# EAGLE board CT_schematic (EAGLE 7.6.0)

Size 100 x 80 mm. Coordinates in mm from the lower left corner, seen from the top.
Outline: 0,0 100,0 100,80 0,80 0,0
Copper layers (1*16): Top 0.035mm / dielectric 1.5mm / Bottom 0.035mm
Design rules "default": minimum track width 10mil, minimum drill 24mil, track to track 8mil, track to pad 8mil, pad to pad 8mil, via to via 8mil, smd to smd 8mil, copper to edge 40mil, drill to drill 8mil, minimum pad ring 10mil, minimum via ring 8mil, stop-mask expansion 4mil, vias tented up to drill 0mil, thermal gap 10mil

## Footprints (pad centres in the part's own frame; a part is rotated, then mirrored left to right if it is on the bottom)
C0603 = smd 0.8 x 0.8: 1 -0.762,0; 2 0.762,0
C0402 = smd 0.5 x 0.5: 1 -0.508,0; 2 0.508,0
C0805 = smd 1.2 x 1.3: 1 -1.016,0; 2 1.016,0
2220 = smd 1.85 x 5.5: 1 -2.55,0; 2 2.55,0
EXV-9H = smd 3.505 x 1.676: 1 -2.857,0; 2 2.857,0
L0603 = smd 0.8 x 0.8: 1 -0.762,0; 2 0.762,0
WE-HCI_7030/7040/7050 = smd 2.5 x 3: 1 -2.45,0; 2 2.45,0
PJ-037B_PACKAGE = drill 3.7 square: 1 12,0 | drill 3.2 square: 2 6,0
R0603 = smd 0.8 x 0.8: 1 -0.762,0; 2 0.762,0
UFQFPN48 = smd 0.559 x 0.305: 1 -3.375,2.751; 2 -3.375,2.251; 3 -3.375,1.75; 4 -3.375,1.25; 5 -3.375,0.75; 6 -3.375,0.25; 7 -3.375,-0.25; 8 -3.375,-0.75; 9 -3.375,-1.25; 10 -3.375,-1.75; 11 -3.375,-2.251; 12 -3.375,-2.751; 25 3.375,-2.751; 26 3.375,-2.251; 27 3.375,-1.75; 28 3.375,-1.25; 29 3.375,-0.75; 30 3.375,-0.25; 31 3.375,0.25; 32 3.375,0.75; 33 3.375,1.25; 34 3.375,1.75; 35 3.375,2.251; 36 3.375,2.751 | smd 0.305 x 0.559: 13 -2.751,-3.375; 14 -2.251,-3.375; 15 -1.75,-3.375; 16 -1.25,-3.375; 17 -0.75,-3.375; 18 -0.25,-3.375; 19 0.25,-3.375; 20 0.75,-3.375; 21 1.25,-3.375; 22 1.75,-3.375; 23 2.251,-3.375; 24 2.751,-3.375; 37 2.751,3.375; 38 2.251,3.375; 39 1.75,3.375; 40 1.25,3.375; 41 0.75,3.375; 42 0.25,3.375; 43 -0.25,3.375; 44 -0.75,3.375; 45 -1.25,3.375; 46 -1.75,3.375; 47 -2.251,3.375; 48 -2.751,3.375 | smd 5.588 x 5.588: 49 0,0
SOIC-8 = smd 1.6 x 0.6: 1 -2.7,1.905 | smd 1.55 x 0.6: 2 -2.7,0.635; 3 -2.7,-0.635; 4 -2.7,-1.905; 5 2.7,-1.905; 6 2.7,-0.635; 7 2.7,0.635; 8 2.7,1.905
SSOP-28 = smd 1.5 x 0.4: 1 -3.625,4.225; 2 -3.625,3.575; 3 -3.625,2.925; 4 -3.625,2.275; 5 -3.625,1.625; 6 -3.625,0.975; 7 -3.625,0.325; 8 -3.625,-0.325; 9 -3.625,-0.975; 10 -3.625,-1.625; 11 -3.625,-2.275; 12 -3.625,-2.925; 13 -3.625,-3.575; 14 -3.625,-4.225; 15 3.625,-4.225; 16 3.625,-3.575; 17 3.625,-2.925; 18 3.625,-2.275; 19 3.625,-1.625; 20 3.625,-0.975; 21 3.625,-0.325; 22 3.625,0.325; 23 3.625,0.975; 24 3.625,1.625; 25 3.625,2.275; 26 3.625,2.925; 27 3.625,3.575; 28 3.625,4.225
FCI_10118193-0001LF = smd 0.4 x 1.35: 1 -1.3,2.675; 2 -0.65,2.675; 3 0,2.675; 4 0.65,2.675; 5 1.3,2.675 | smd 1.6 x 1.4: 6 -3.2,2.45; 7 3.2,2.45 | smd 1.9 x 1.9: 8 -1.2,0; 9 1.2,0 | hole 0.5: -3.3,0; 3.3,0
SAMTEC_FTSH-105-01-L-DV-K = smd 0.762 x 2.794: 1 -2.54,-2.032; 2 -2.54,2.032; 3 -1.27,-2.032; 4 -1.27,2.032; 5 0,-2.032; 6 0,2.032; 7 1.27,-2.032; 8 1.27,2.032; 9 2.54,-2.032; 10 2.54,2.032
TDFN-8/6MM = smd 0.3 x 0.75: 1 0,0; 2 0.5,0; 3 1,0; 4 1.5,0; 5 1.5,3; 6 1,3; 7 0.5,3; 8 0,3
ASEK = smd 1.4 x 1: 1 -1.1,-0.8; 2 1.1,-0.8; 3 1.1,0.8; 4 -1.1,0.8
ASFL1 = smd 1.7 x 1.5: 1 -1.27,-1.1; 2 1.27,-1.1; 3 1.27,1.1; 4 -1.27,1.1
IDT74FCT38072 = smd 0.51 x 1: 1 0,0; 2 1.27,0; 3 2.54,0; 4 3.81,0; 5 3.81,4.95; 6 2.54,4.95; 7 1.27,4.95; 8 0,4.95
QFN-16_EP = smd 0.805 x 0.3: 1 -1.452,0.75; 2 -1.452,0.25; 3 -1.452,-0.25; 4 -1.452,-0.75; 9 1.452,-0.75; 10 1.452,-0.25; 11 1.452,0.25; 12 1.452,0.75 | smd 0.3 x 0.805: 5 -0.75,-1.452; 6 -0.25,-1.452; 7 0.25,-1.452; 8 0.75,-1.452; 13 0.75,1.452; 14 0.25,1.452; 15 -0.25,1.452; 16 -0.75,1.452 | smd 1.55 x 1.55: 17 0,0
SON-6 = smd 0.55 x 0.3: 1 -0.355,0.5 | smd 0.52 x 0.3: 2 -0.37,0; 3 -0.37,-0.5; 4 0.37,-0.5; 5 0.37,0; 6 0.37,0.5
SW_4-1437565-2 = smd 1.4 x 2.1: 1 -2.23,4.55; 2 -2.23,-4.55; 3 2.23,4.55; 4 2.23,-4.55
LGM67K-G1J2-24-Z = smd 0.8 x 1.4: A -2,0; C 0,0
NC7SZ125M5X = smd 1.3 x 0.7: 1 -1.3,0.95; 2 -1.3,0; 3 -1.3,-0.95; 4 1.3,-0.95; 5 1.3,0.95

## Placement (x,y rotation side)
C1  1e-06  [C0603]  -15.24,69.85 0 top  (outside the outline)
C2  1e-07  [C0603]  -19.05,69.85 0 top  (outside the outline)
C3  1e-07  [C0603]  -22.86,69.85 0 top  (outside the outline)
C4  1e-07  [C0603]  -26.67,69.85 0 top  (outside the outline)
C5  1e-07  [C0603]  -30.48,69.85 0 top  (outside the outline)
C6  4.7e-06  [C0603]  -74.93,64.77 0 top  (outside the outline)
C7  1e-08  [C0603]  -34.29,69.85 0 top  (outside the outline)
C8  1e-08  [C0603]  -38.1,69.85 0 top  (outside the outline)
C9  1e-06  [C0603]  -41.91,69.85 0 top  (outside the outline)
C10  1e-08  [C0402]  -34.29,74.93 0 top  (outside the outline)
C11  1e-07  [C0402]  -38.1,74.93 0 top  (outside the outline)
C12  4.7e-06  [C0805]  -21.59,58.42 0 top  (outside the outline)
C13  1e-07  [C0402]  -41.91,74.93 0 top  (outside the outline)
C14  1e-07  [C0402]  -45.72,74.93 0 top  (outside the outline)
C15  1e-07  [C0402]  -49.53,74.93 0 top  (outside the outline)
C16  4.7e-06  [C0805]  -26.67,58.42 0 top  (outside the outline)
C17  1e-07  [C0402]  -53.34,74.93 0 top  (outside the outline)
C18  1e-07  [C0402]  -57.15,74.93 0 top  (outside the outline)
C19  1e-07  [C0402]  -60.96,74.93 0 top  (outside the outline)
C20  1e-08  [C0402]  -64.77,74.93 0 top  (outside the outline)
C21  1e-08  [C0402]  -68.58,74.93 0 top  (outside the outline)
C22  1e-08  [C0402]  -72.39,74.93 0 top  (outside the outline)
C23  1e-08  [C0402]  -76.2,74.93 0 top  (outside the outline)
C24  1e-08  [C0402]  -15.24,80.01 0 top  (outside the outline)
C25  1e-05  [C0805]  -31.75,58.42 0 top  (outside the outline)
C26  1e-06  [C0603]  -45.72,69.85 0 top  (outside the outline)
C27  1e-07  [C0402]  -19.05,80.01 0 top  (outside the outline)
C28  6.8e-05  [2220]  -31.75,34.29 0 top  (outside the outline)
C29  1e-07  [C0402]  -22.86,80.01 0 top  (outside the outline)
C30  0.0001  [EXV-9H]  -38.1,52.07 0 top  (outside the outline)
C31  0.0001  [EXV-9H]  -49.53,52.07 0 top  (outside the outline)
C32  1e-08  [C0402]  -26.67,80.01 0 top  (outside the outline)
C33  1e-08  [C0402]  -30.48,80.01 0 top  (outside the outline)
F1  240.0  [L0603]  -49.53,69.85 0 top  (outside the outline)
I1  3.3e-06  [WE-HCI_7030/7040/7050]  -33.02,21.59 0 top  (outside the outline)
J1  PJ-037B  [PJ-037B_PACKAGE]  -27.94,22.86 0 top  (outside the outline)
R1  10000.0  [R0603]  -52.07,58.42 0 top  (outside the outline)
R2  1000.0  [R0603]  -53.34,69.85 0 top  (outside the outline)
R3  1600.5  [R0603]  -57.15,69.85 0 top  (outside the outline)
R4  4700.0  [R0603]  -60.96,69.85 0 top  (outside the outline)
R5  2200.0  [R0603]  -64.77,69.85 0 top  (outside the outline)
R6  2200.0  [R0603]  -68.58,69.85 0 top  (outside the outline)
R7  10000.0  [R0603]  -57.15,58.42 0 top  (outside the outline)
R8  10000.0  [R0603]  -62.23,58.42 0 top  (outside the outline)
R9  10000.0  [R0603]  -67.31,58.42 0 top  (outside the outline)
R10  10000.0  [R0603]  -72.39,58.42 0 top  (outside the outline)
R11  4700.0  [R0603]  -72.39,69.85 0 top  (outside the outline)
R12  10000.0  [R0603]  -15.24,64.77 0 top  (outside the outline)
R13  10000.0  [R0603]  -20.32,64.77 0 top  (outside the outline)
R14  4700.0  [R0603]  -15.24,74.93 0 top  (outside the outline)
R15  10000.0  [R0603]  -25.4,64.77 0 top  (outside the outline)
R16  10000.0  [R0603]  -30.48,64.77 0 top  (outside the outline)
R17  10000.0  [R0603]  -35.56,64.77 0 top  (outside the outline)
R18  10000.0  [R0603]  -40.64,64.77 0 top  (outside the outline)
R19  10000.0  [R0603]  -45.72,64.77 0 top  (outside the outline)
R20  10000.0  [R0603]  -50.8,64.77 0 top  (outside the outline)
R21  5.0  [R0603]  -19.05,74.93 0 top  (outside the outline)
R22  20000.0  [R0603]  -55.88,64.77 0 top  (outside the outline)
R23  91000.0  [R0603]  -60.96,64.77 0 top  (outside the outline)
R24  300000.0  [R0603]  -36.83,58.42 0 top  (outside the outline)
R25  10000.0  [R0603]  -66.04,64.77 0 top  (outside the outline)
R26  10000.0  [R0603]  -71.12,64.77 0 top  (outside the outline)
R27  9100.0  [R0603]  -22.86,74.93 0 top  (outside the outline)
R28  680000.0  [R0603]  -41.91,58.42 0 top  (outside the outline)
R29  120000.0  [R0603]  -46.99,58.42 0 top  (outside the outline)
U1  STM32F101CBU6  [UFQFPN48]  -40.64,34.29 0 top  (outside the outline)
U2  AT25512N-SH-T  [SOIC-8]  -22.86,34.29 0 top  (outside the outline)
U3  FT232RL-REEL  [SSOP-28]  -20.32,7.62 0 top  (outside the outline)
U4  10118193-0001LF  [FCI_10118193-0001LF]  -35.56,43.18 0 top  (outside the outline)
U5  FT232RL-REEL  [SSOP-28]  -33.02,7.62 0 top  (outside the outline)
U6  10118193-0001LF  [FCI_10118193-0001LF]  -45.72,43.18 0 top  (outside the outline)
U7  FTSH-105-01-L-DV-K  [SAMTEC_FTSH-105-01-L-DV-K]  -62.23,7.62 0 top  (outside the outline)
U8  24AA02T-I/MNY  [TDFN-8/6MM]  -67.31,19.05 0 top  (outside the outline)
U9  ASEK-32.768KHz-ECST  [ASEK]  -29.21,52.07 0 top  (outside the outline)
U10  ASFL1-12MHZ-NCS  [ASFL1]  -59.69,34.29 0 top  (outside the outline)
U11  idt74fct38072  [IDT74FCT38072]  -67.31,40.64 0 top  (outside the outline)
U12  ASFL1-25MHZ-NCS  [ASFL1]  -26.67,43.18 0 top  (outside the outline)
U13  LTC3601EUD#PBF  [QFN-16_EP]  -27.94,74.93 0 top  (outside the outline)
U14  TPS3895ADRYR  [SON-6]  -33.02,78.74 0 top  (outside the outline)
U15  4-1437565-2  [SW_4-1437565-2]  -52.07,21.59 0 top  (outside the outline)
U16  Q65110A2395  [LGM67K-G1J2-24-Z]  -59.69,52.07 0 top  (outside the outline)
U17  nc7sz125m5x  [NC7SZ125M5X]  -71.12,50.8 0 top  (outside the outline)
U18  nc7sz125m5x  [NC7SZ125M5X]  -15.24,58.42 0 top  (outside the outline)

## Library data of the parts
C1-C33 F1 I1 J1 R1-R29 U1-U18 = circuit_tree

## Nets
CLK_U1_3: U1.3 U9.3
CLK_U1_5: U1.5 U12.3
CLK_U3_27: U3.27 U11.7
CLK_U5_27: U5.27 U11.6
CLK_U11_3: U10.3 U11.3
GND: C1.2 C2.2 C3.2 C4.2 C5.2 C6.2 C7.2 C8.2 C9.2 C10.2 C11.2 C12.2 C13.2 C14.2 C15.2 C16.2 C17.2 C18.2 C19.2 C20.2 C21.2 C22.2 C23.2 C24.2 C25.2 C26.2 C28.1 C28.2 C29.2 C30.2 C31.2 C32.2 C33.2 J1.2 R2.2 R7.2 R13.2 R16.2 R20.2 R21.2 R22.2 R24.2 R27.2 R29.2 U1.8 U1.23 U1.35 U1.47 U1.49 U2.4 U3.7 U3.18 U3.21 U3.25 U3.26 U4.5 U4.6 U4.7 U4.8 U4.9 U5.7 U5.18 U5.21 U5.25 U5.26 U6.5 U6.6 U6.7 U6.8 U6.9 U7.3 U7.5 U8.4 U8.7 U9.2 U10.2 U11.4 U11.5 U11.8 U12.2 U13.1 U13.9 U13.17 U14.2 U16.C U17.2 U17.3 U18.1 U18.3
NET_U1_7: R4.1 U1.7 U18.4
NET_U1_9: C7.1 C8.1 C9.1 F1.1 U1.9
NET_U1_42: R5.1 U1.42 U8.6
NET_U1_43: R6.1 U1.43 U8.5
NET_U1_44: R7.1 U1.44
NET_U1_45: R3.1 U1.45 U16.A
NET_U1_46: R1.1 U1.46 U15.3 U15.4
NET_U2_3: R8.1 U2.3
NET_U2_7: R10.1 U2.7
NET_U3_14: R12.1 U3.14
NET_U3_17: C13.1 U3.17
NET_U3_19: R13.1 U3.19
NET_U4_1: R11.1 U4.1
NET_U4_2: U3.16 U4.2
NET_U4_3: U3.15 U4.3
NET_U4_19: R11.2
NET_U5_14: R15.1 U5.14
NET_U5_17: C17.1 U5.17
NET_U5_19: R16.1 U5.19
NET_U6_1: R14.1 U6.1
NET_U6_2: U5.16 U6.2
NET_U6_3: U5.15 U6.3
NET_U6_19: R14.2
NET_U7_2: R19.1 U7.2
NET_U7_4: R20.1 U7.4
NET_U7_9: R21.1 U7.9
NET_U13_3: C27.2 I1.1 U13.3 U13.4
NET_U13_6: C27.1 U13.6
NET_U13_7: C26.1 U13.7 U13.12
NET_U13_10: R24.1 U13.10
NET_U13_11: R22.1 R23.1 U13.11
NET_U13_14: U13.14
NET_U13_ATNET_3: I1.2 R23.2
NET_U14_1: R26.1 R27.1 U14.1
NET_U14_3: R28.2 R29.1 U14.3
NET_U14_4: R25.1 U14.4 U17.4 U18.2
NET_U15_1: R2.1 U15.1 U15.2
PROC_SPI1_MISO: U1.16 U2.2
PROC_SPI1_MOSI: U1.17 U2.5
PROC_SPI1_NSS: R9.1 U1.14 U2.1
PROC_SPI1_SCK: U1.15 U2.6
PROC_SYS_JTDI: R18.1 U1.38 U7.8
PROC_SYS_JTDO_TRACESWO: U1.39 U7.6
PROC_USART1_CTS: U1.32 U3.3
PROC_USART1_RX: U1.31 U3.1
PROC_USART1_TX: U1.30 U3.5
PROC_USART2_CTS: U1.10 U5.3
PROC_USART2_RTS: U1.11 U5.11
PROC_USART2_RX: U1.13 U5.1
PROC_USART2_TX: U1.12 U5.5
RST_OUT_U7_JTAG_RST_B: R17.1 U7.10 U17.1
VCC_S1_6V5: C25.1 C30.1 C31.1 J1.1 U13.15 U13.16
VCC_TIER1_3V3: C1.1 C2.1 C3.1 C4.1 C5.1 C6.1 C10.1 C11.1 C12.1 C14.1 C15.1 C16.1 C18.1 C19.1 C20.1 C21.1 C22.1 C23.1 C24.1 C28.2 C29.1 C32.1 C33.1 F1.2 I1.2 R1.2 R3.2 R4.2 R5.2 R6.2 R8.2 R9.2 R10.2 R12.2 R15.2 R17.2 R18.2 R19.2 R23.2 R25.2 R26.2 R28.1 U1.1 U1.24 U1.36 U1.48 U2.8 U3.4 U3.20 U5.4 U5.20 U7.1 U8.8 U9.4 U10.4 U11.1 U11.2 U12.4 U13.8 U14.6 U17.5 U18.5

## Tracks (layer width: path | path; a pad name or v marks a point on that pad's centre or on a via)
CLK_U1_3  (1 unrouted)
CLK_U1_5  (1 unrouted)
CLK_U3_27  (1 unrouted)
CLK_U5_27  (1 unrouted)
CLK_U11_3  (1 unrouted)
GND  (88 unrouted)
NET_U1_7  (2 unrouted)
NET_U1_9  (4 unrouted)
NET_U1_42  (2 unrouted)
NET_U1_43  (2 unrouted)
NET_U1_44  (1 unrouted)
NET_U1_45  (2 unrouted)
NET_U1_46  (3 unrouted)
NET_U2_3  (1 unrouted)
NET_U2_7  (1 unrouted)
NET_U3_14  (1 unrouted)
NET_U3_17  (1 unrouted)
NET_U3_19  (1 unrouted)
NET_U4_1  (1 unrouted)
NET_U4_2  (1 unrouted)
NET_U4_3  (1 unrouted)
NET_U5_14  (1 unrouted)
NET_U5_17  (1 unrouted)
NET_U5_19  (1 unrouted)
NET_U6_1  (1 unrouted)
NET_U6_2  (1 unrouted)
NET_U6_3  (1 unrouted)
NET_U7_2  (1 unrouted)
NET_U7_4  (1 unrouted)
NET_U7_9  (1 unrouted)
NET_U13_3  (3 unrouted)
NET_U13_6  (1 unrouted)
NET_U13_7  (2 unrouted)
NET_U13_10  (1 unrouted)
NET_U13_11  (2 unrouted)
NET_U13_ATNET_3  (1 unrouted)
NET_U14_1  (2 unrouted)
NET_U14_3  (2 unrouted)
NET_U14_4  (3 unrouted)
NET_U15_1  (2 unrouted)
PROC_SPI1_MISO  (1 unrouted)
PROC_SPI1_MOSI  (1 unrouted)
PROC_SPI1_NSS  (2 unrouted)
PROC_SPI1_SCK  (1 unrouted)
PROC_SYS_JTDI  (2 unrouted)
PROC_SYS_JTDO_TRACESWO  (1 unrouted)
PROC_USART1_CTS  (1 unrouted)
PROC_USART1_RX  (1 unrouted)
PROC_USART1_TX  (1 unrouted)
PROC_USART2_CTS  (1 unrouted)
PROC_USART2_RTS  (1 unrouted)
PROC_USART2_RX  (1 unrouted)
PROC_USART2_TX  (1 unrouted)
RST_OUT_U7_JTAG_RST_B  (2 unrouted)
VCC_S1_6V5  (5 unrouted)
VCC_TIER1_3V3  (61 unrouted)